# Altium PCB ROW.PcbDoc (part 1 of 3)
Units mm, origin at the board's own origin, x right, y up, seen from the top; angles counter-clockwise.
Board outline 176.65 x 110.9 mm, 2 copper layers (Top Layer, Bottom Layer); 156 components, 298 nets, 1223 pads, 409 vias.
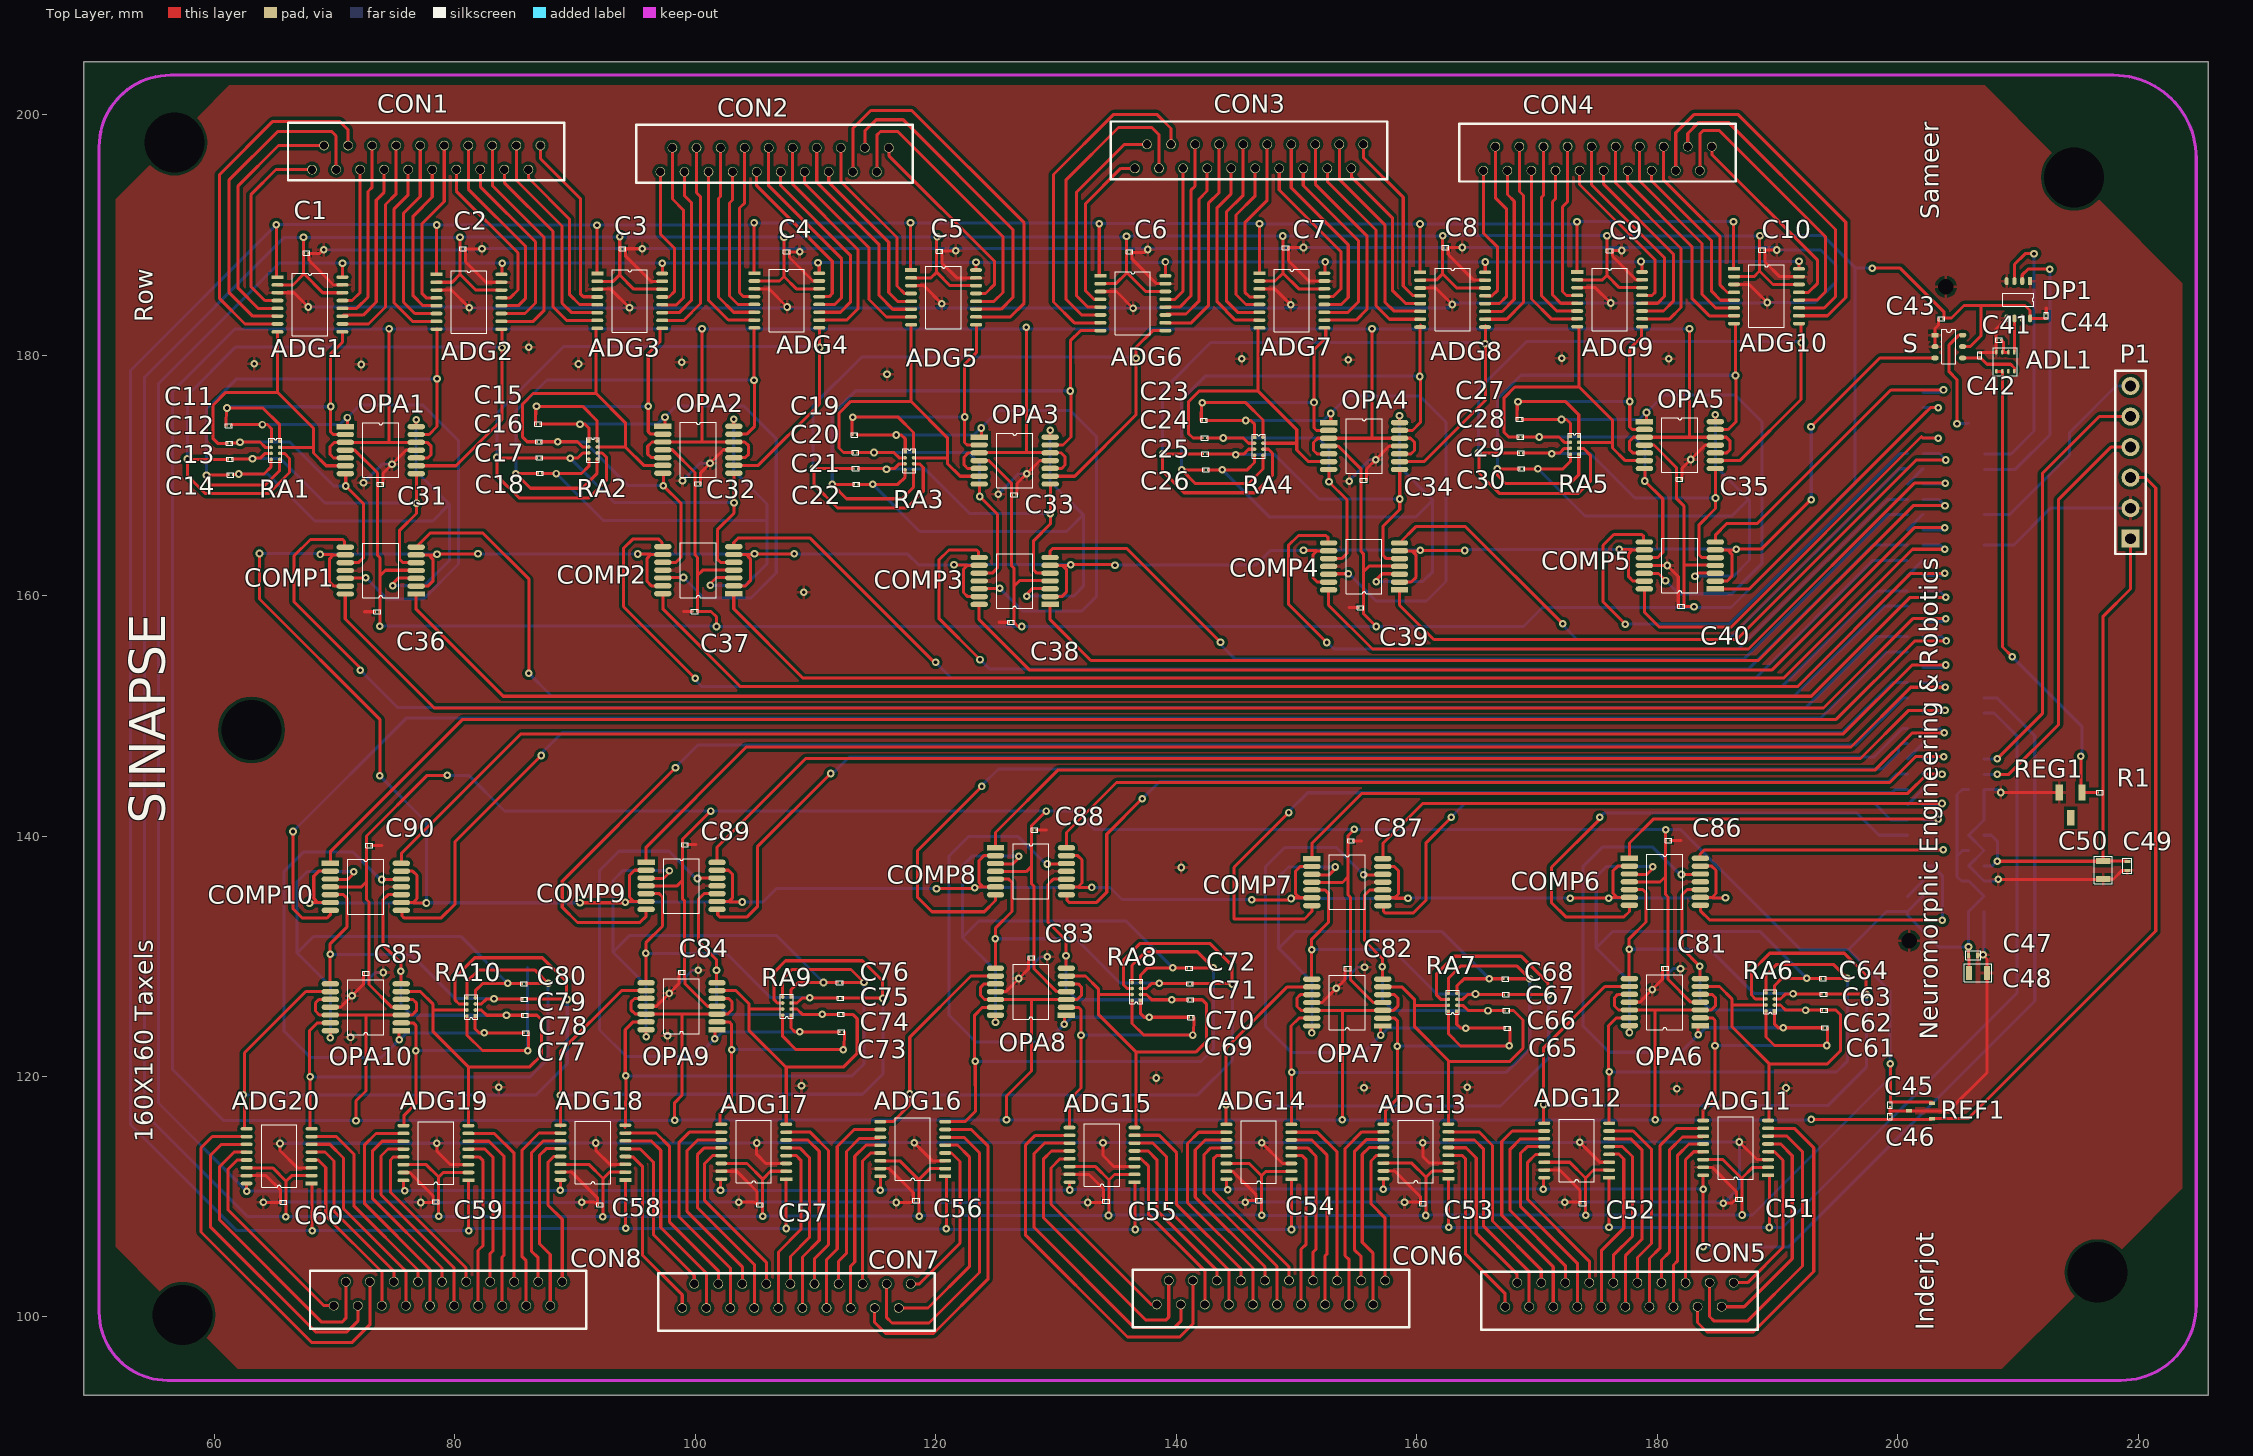
[diagram p0: Top Layer view]
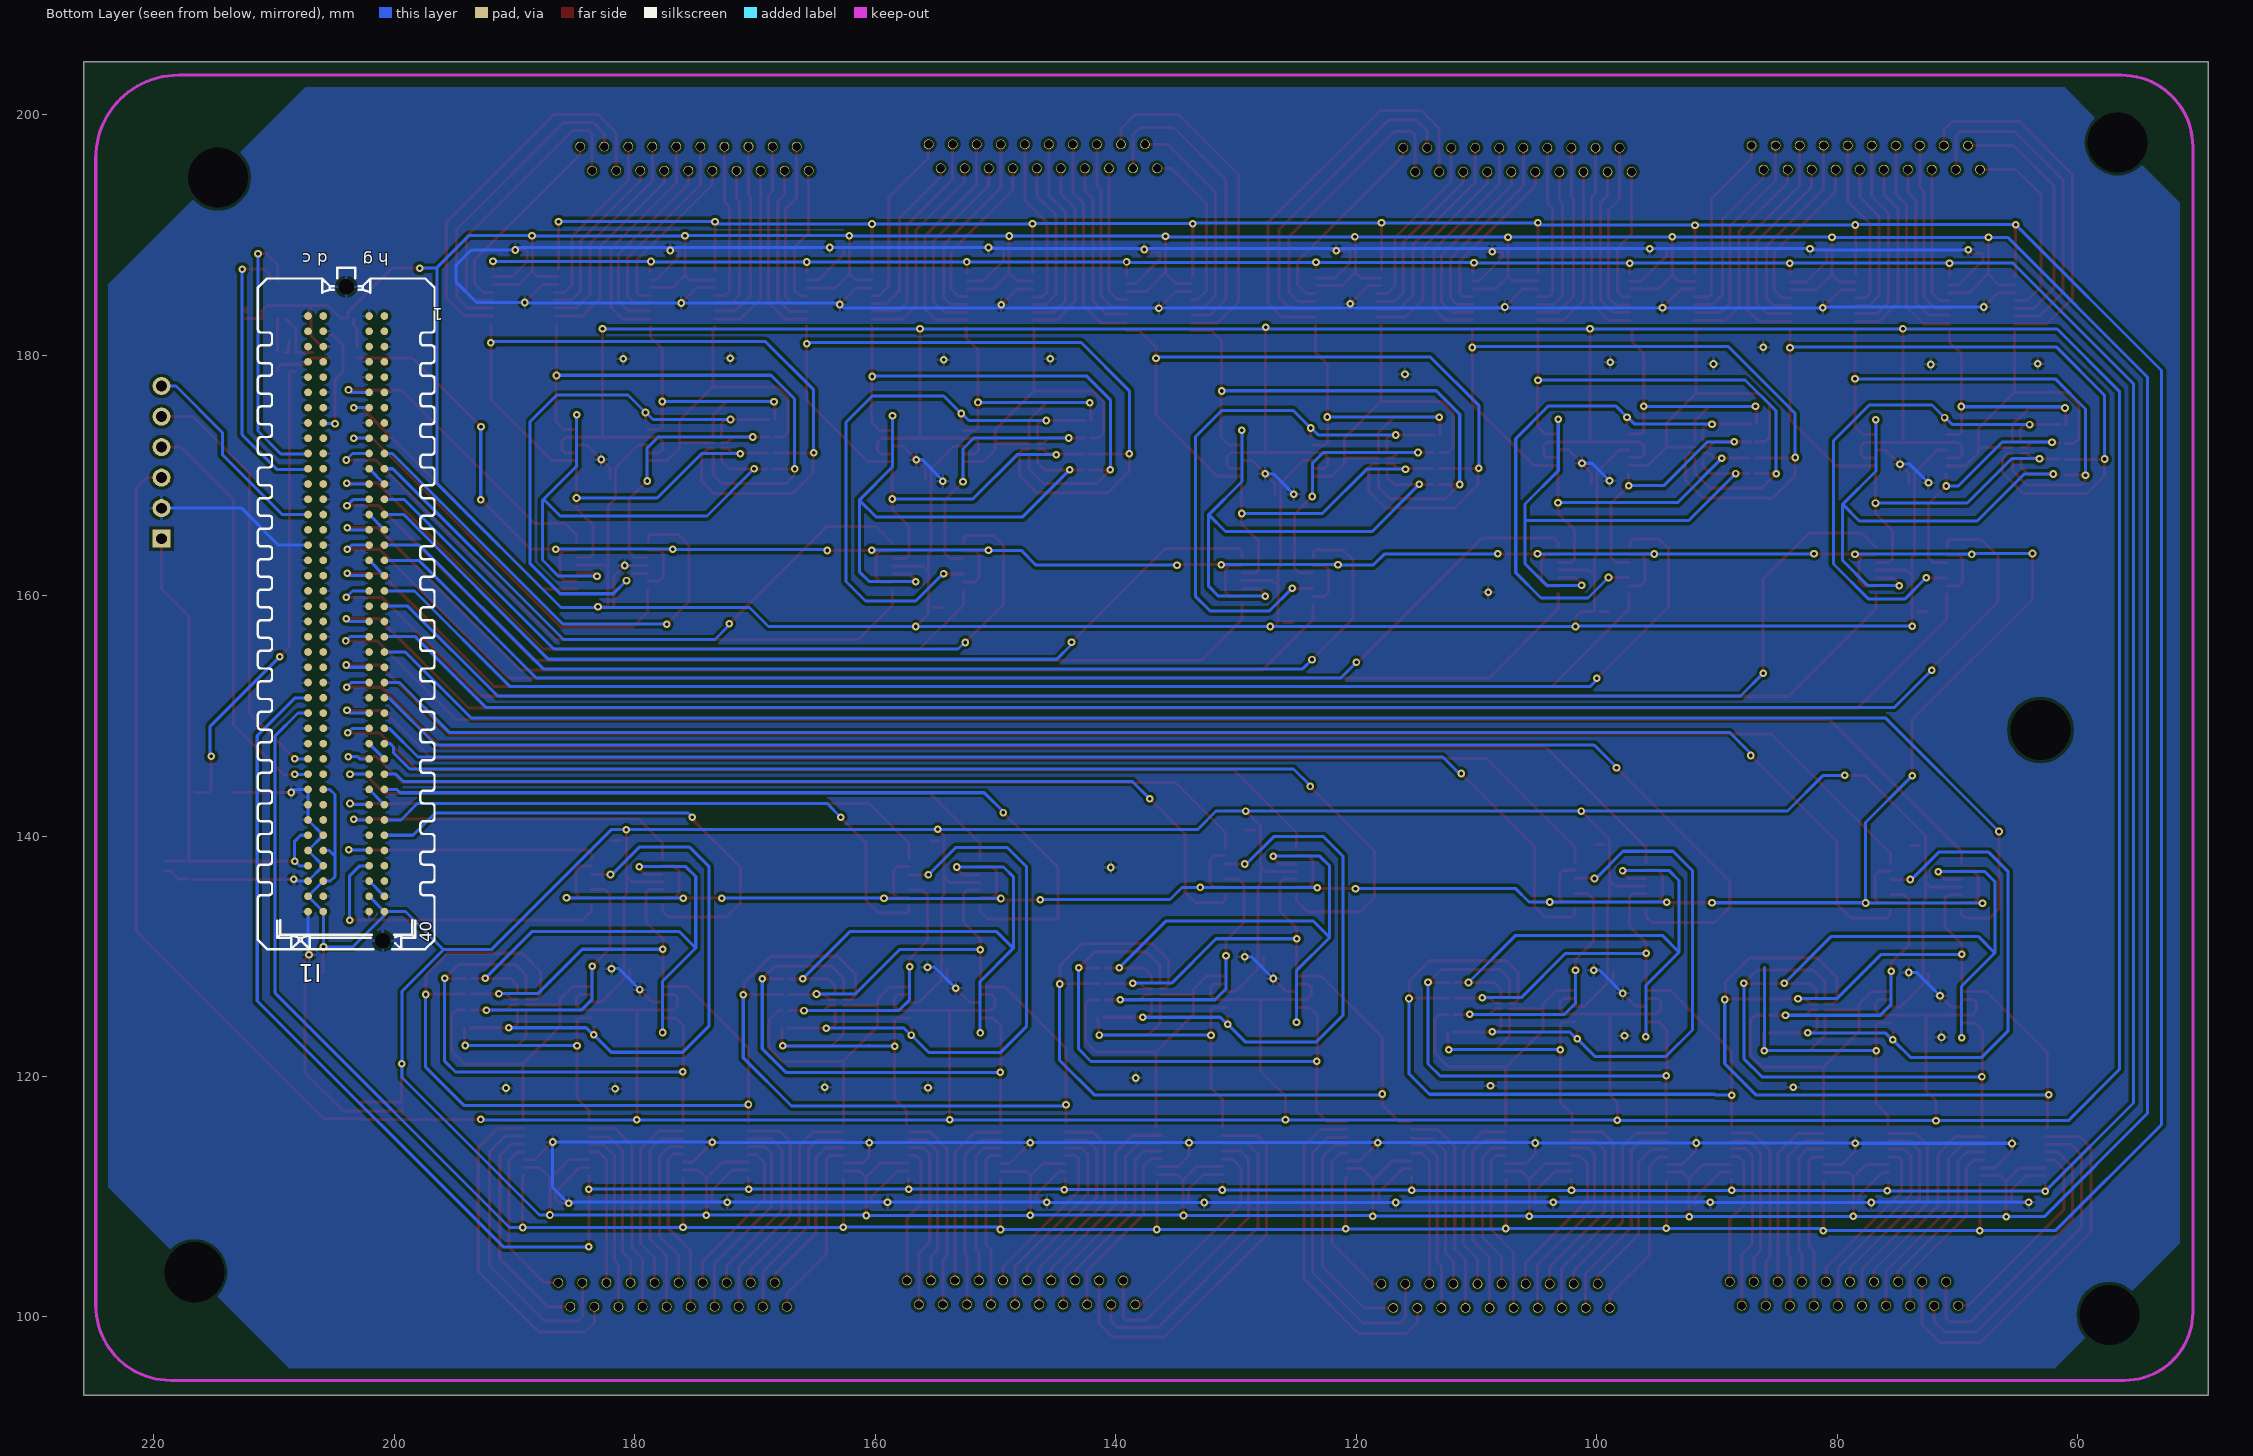
[diagram p1: Bottom Layer view, seen from below]

## Layer stack, top to bottom
Top Solder: solder mask 0.0102, Solder Resist, Dk 3.5
Top Layer: signal copper 0.0356
Dielectric 1: dielectric 0.32, FR-4, Dk 4.8
Bottom Layer: signal copper 0.0356
Bottom Solder: solder mask 0.0102, Solder Resist, Dk 3.5

## Board outline
225.8,93.475 225.8,204.375 49.15,204.375 49.15,93.475

## Design rules (kind name [scope] priority, off if disabled: settings)
Clearance [All] p1: gap=0.254 except(0.1: SMDPad-SMDPad THPad-THPad SMDPad-THPad; 0.2: Arc-Arc Arc-Track Arc-SMDPad Arc-Via THPad-Via Via-Via Track-SMDPad Track-Track SMDPad-Via Track-Via Arc-THPad Track-THPad)
HoleSize [All] p1: absolutevalues=TRUE maxlimit=6 minlimit=0.3 maxpercent=80.000 minpercent=20.000
HoleToHoleClearance [All] p1: gap=0.3 allowstackedmicrovias=TRUE
MinimumSolderMaskSliver [All] p1: minsoldermaskwidth=0
PolygonConnect [All] p1: connectstyle=Relief reliefconductorwidth=0.254 reliefentries=4 polygonreliefangle="90 Angle" airgapwidth=0.254
RoutingVias [All] p1: holewidth=0.305 width=0.635 viastyle="Through Hole" minholewidth=0.305 minwidth=0.635 maxholewidth=0.711 maxwidth=1.27
SilkToSilkClearance [All] p1: silktosilkclearance=0
SilkToSolderMaskClearance [IsPad] p1: minsilkscreentomaskgap=0 clearancetoexposedcopper=TRUE
SolderMaskExpansion [All] p1: expansion=0.05
UnpouredPolygon [All] p1: allowunpoured=FALSE
Width [All] p1: maxlimit=0.8 minlimit=0.2 preferedwidth=0.2
24 further rules are at their usual default settings.

## Components (designator, comment, footprint, x,y, rotation, side; value= is the part's Value field where it differs from the comment)
ADG1 "ADG709" TSSOP16 65.244,186.484 r0 top
ADG2 "ADG709" TSSOP16 78.465,186.706 r0 top
ADG3 "ADG709" TSSOP16 91.84,186.78 r0 top
ADG4 "ADG709" TSSOP16 104.9,186.81 r0 top
ADG5 "ADG709" TSSOP16 117.94,187.07 r0 top
ADG6 "ADG709" TSSOP16 133.684,186.584 r0 top (schematic designator ADG1)
ADG7 "ADG709" TSSOP16 146.905,186.806 r0 top (schematic designator ADG2)
ADG8 "ADG709" TSSOP16 160.28,186.88 r0 top (schematic designator ADG3)
ADG9 "ADG709" TSSOP16 173.34,186.91 r0 top (schematic designator ADG4)
ADG10 "ADG709" TSSOP16 186.38,187.17 r0 top (schematic designator ADG5)
ADG11 "ADG709" TSSOP16 189.216,111.791 r180 top (schematic designator ADG1)
ADG12 "ADG709" TSSOP16 175.995,111.569 r180 top (schematic designator ADG2)
ADG13 "ADG709" TSSOP16 162.62,111.495 r180 top (schematic designator ADG3)
ADG14 "ADG709" TSSOP16 149.56,111.465 r180 top (schematic designator ADG4)
ADG15 "ADG709" TSSOP16 136.52,111.205 r180 top (schematic designator ADG5)
ADG16 "ADG709" TSSOP16 120.776,111.691 r180 top (schematic designator ADG1)
ADG17 "ADG709" TSSOP16 107.555,111.469 r180 top (schematic designator ADG2)
ADG18 "ADG709" TSSOP16 94.18,111.395 r180 top (schematic designator ADG3)
ADG19 "ADG709" TSSOP16 81.12,111.365 r180 top (schematic designator ADG4)
ADG20 "ADG709" TSSOP16 68.08,111.105 r180 top (schematic designator ADG5)
ADL1 "CURRENT MIRROR" LFCSP8 209.7,180.25 r270 top
C1 "Cap" 0402#1 67.65,188.48 r0 top
C2 "Cap" 0402#1 80.66,188.83 r0 top
C3 "Cap" 0402#1 93.94,188.84 r0 top
C4 "Cap" 0402#1 107.6,188.58 r0 top
C5 "Cap" 0402#1 120.29,188.64 r0 top
C6 "Cap" 0402#1 136.09,188.58 r0 top (schematic designator C1)
C7 "Cap" 0402#1 149.1,188.93 r0 top (schematic designator C2)
C8 "Cap" 0402#1 162.38,188.94 r0 top (schematic designator C3)
C9 "Cap" 0402#1 176.04,188.68 r0 top (schematic designator C4)
C10 "Cap" 0402#1 188.73,188.74 r0 top (schematic designator C5)
C11 "Cap" 0402#1 61.195,174.13 r180 top
C12 "Cap" 0402#1 61.255,172.66 r180 top
C13 "Cap" 0402#1 61.295,171.33 r180 top
C14 "Cap" 0402#1 61.345,170.03 r180 top
C15 "Cap" 0402#1 86.93,174.26 r180 top (schematic designator C11)
C16 "Cap" 0402#1 86.99,172.79 r180 top (schematic designator C12)
C17 "Cap" 0402#1 87.03,171.46 r180 top (schematic designator C13)
C18 "Cap" 0402#1 87.08,170.16 r180 top (schematic designator C14)
C19 "Cap" 0402#1 113.24,173.36 r180 top (schematic designator C11)
C20 "Cap" 0402#1 113.3,171.89 r180 top (schematic designator C12)
C21 "Cap" 0402#1 113.34,170.56 r180 top (schematic designator C13)
C22 "Cap" 0402#1 113.39,169.26 r180 top (schematic designator C14)
C23 "Cap" 0402#1 142.3,174.57 r180 top (schematic designator C11)
C24 "Cap" 0402#1 142.36,173.1 r180 top (schematic designator C12)
C25 "Cap" 0402#1 142.4,171.77 r180 top (schematic designator C13)
C26 "Cap" 0402#1 142.45,170.47 r180 top (schematic designator C14)
C27 "Cap" 0402#1 168.56,174.65 r180 top (schematic designator C11)
C28 "Cap" 0402#1 168.62,173.18 r180 top (schematic designator C12)
C29 "Cap" 0402#1 168.66,171.85 r180 top (schematic designator C13)
C30 "Cap" 0402#1 168.71,170.55 r180 top (schematic designator C14)
C31 "Cap" 0402#1 73.8,169.26 r180 top
C32 "Cap" 0402#1 100.21,169.29 r180 top (schematic designator C31)
C33 "Cap" 0402#1 126.52,168.39 r180 top (schematic designator C31)
C34 "Cap" 0402#1 155.58,169.6 r180 top (schematic designator C31)
C35 "Cap" 0402#1 181.84,169.68 r180 top (schematic designator C31)
C36 "Cap" 0402#1 73.54,158.65 r0 top
C37 "Cap" 0402#1 99.95,158.68 r0 top (schematic designator C36)
C38 "Cap" 0402#1 126.26,157.78 r0 top (schematic designator C36)
C39 "Cap" 0402#1 155.32,158.99 r0 top (schematic designator C36)
C40 "Cap" 0402#1 181.986,159.104 r0 top (schematic designator C36)
C41 "Cap" 0402#1 208.4,181.25 r0 top
C42 "Cap" 0402#1 206.815,179.985 r270 top
C43 "Cap" 0402#1 203.625,183.025 r0 top
C44 "Cap" 0402#1 212.345,183.285 r270 top
C45 "Cap" 0402#1 199.35,117.64 r90 top
C46 "Cap" 0402#1 199.35,116.66 r270 top
C47 "Cap" 1005 206.26,130.08 r180 top
C48 "Cap" 2012 206.67,128.61 r180 top
C49 "Cap" 1005 219.095,137.52 r90 top
C50 "Cap" 2012 217.07,137.17 r90 top
C51 "Cap" 0402#2 186.81,109.795 r180 top (schematic designator C1)
C52 "Cap" 0402#1 173.8,109.445 r180 top (schematic designator C2)
C53 "Cap" 0402#1 160.52,109.435 r180 top (schematic designator C3)
C54 "Cap" 0402#1 146.86,109.695 r180 top (schematic designator C4)
C55 "Cap" 0402#1 134.17,109.635 r180 top (schematic designator C5)
C56 "Cap" 0402#1 118.37,109.695 r180 top (schematic designator C1)
C57 "Cap" 0402#1 105.36,109.345 r180 top (schematic designator C2)
C58 "Cap" 0402#1 92.08,109.335 r180 top (schematic designator C3)
C59 "Cap" 0402#1 78.42,109.595 r180 top (schematic designator C4)
C60 "Cap" 0402#1 65.73,109.535 r180 top (schematic designator C5)
C61 "Cap" 0402#1 193.94,124.045 r0 top (schematic designator C11)
C62 "Cap" 0402#1 193.88,125.515 r0 top (schematic designator C12)
C63 "Cap" 0402#1 193.84,126.845 r0 top (schematic designator C13)
C64 "Cap" 0402#1 193.79,128.145 r0 top (schematic designator C14)
C65 "Cap" 0402#1 167.53,124.015 r0 top (schematic designator C11)
C66 "Cap" 0402#1 167.47,125.485 r0 top (schematic designator C12)
C67 "Cap" 0402#1 167.43,126.815 r0 top (schematic designator C13)
C68 "Cap" 0402#1 167.38,128.115 r0 top (schematic designator C14)
C69 "Cap" 0402#1 141.22,124.915 r0 top (schematic designator C11)
C70 "Cap" 0402#1 141.16,126.385 r0 top (schematic designator C12)
C71 "Cap" 0402#1 141.12,127.715 r0 top (schematic designator C13)
C72 "Cap" 0402#1 141.07,129.015 r0 top (schematic designator C14)
C73 "Cap" 0402#1 112.16,123.705 r0 top (schematic designator C11)
C74 "Cap" 0402#1 112.1,125.175 r0 top (schematic designator C12)
C75 "Cap" 0402#1 112.06,126.505 r0 top (schematic designator C13)
C76 "Cap" 0402#1 112.01,127.805 r0 top (schematic designator C14)
C77 "Cap" 0402#1 85.9,123.625 r0 top (schematic designator C11)
C78 "Cap" 0402#1 85.84,125.095 r0 top (schematic designator C12)
C79 "Cap" 0402#1 85.8,126.425 r0 top (schematic designator C13)
C80 "Cap" 0402#1 85.75,127.725 r0 top (schematic designator C14)
C81 "Cap" 0402#1 180.66,129.015 r0 top (schematic designator C31)
C82 "Cap" 0402#1 154.25,128.985 r0 top (schematic designator C31)
C83 "Cap" 0402#1 127.94,129.885 r0 top (schematic designator C31)
C84 "Cap" 0402#1 98.88,128.675 r0 top (schematic designator C31)
C85 "Cap" 0402#1 72.62,128.595 r0 top (schematic designator C31)
C86 "Cap" 0402#1 180.92,139.625 r180 top (schematic designator C36)
C87 "Cap" 0402#1 154.51,139.595 r180 top (schematic designator C36)
C88 "Cap" 0402#1 128.2,140.495 r180 top (schematic designator C36)
C89 "Cap" 0402#1 99.14,139.285 r180 top (schematic designator C36)
C90 "Cap" 0402#1 72.88,139.205 r180 top (schematic designator C36)
COMP1 "MCP6564" TSSOP14 76.78,160.13 r180 top
COMP2 "MCP6564" TSSOP14 103.19,160.16 r180 top (schematic designator COMP1)
COMP3 "MCP6564" TSSOP14 129.5,159.26 r180 top (schematic designator COMP1)
COMP4 "MCP6564" TSSOP14 158.56,160.47 r180 top (schematic designator COMP1)
COMP5 "MCP6564" TSSOP14 184.82,160.55 r180 top (schematic designator COMP1)
COMP6 "MCP6564" TSSOP14 177.68,138.145 r0 top (schematic designator COMP1)
COMP7 "MCP6564" TSSOP14 151.27,138.115 r0 top (schematic designator COMP1)
COMP8 "MCP6564" TSSOP14 124.96,139.015 r0 top (schematic designator COMP1)
COMP9 "MCP6564" TSSOP14 95.9,137.805 r0 top (schematic designator COMP1)
COMP10 "MCP6564" TSSOP14 69.64,137.725 r0 top (schematic designator COMP1)
CON1 "FFC_CON" FFC_THT_20_1 68.115,195.425 r0 top
CON2 "FFC_CON" FFC_THT_20_1 97.092,195.238 r0 top
CON3 "FFC_CON" FFC_THT_20_1 136.555,195.525 r0 top (schematic designator CON1)
CON4 "FFC_CON" FFC_THT_20_1 165.532,195.338 r0 top (schematic designator CON2)
CON5 "FFC_CON" FFC_THT_20_1 186.345,102.85 r180 top (schematic designator CON1)
CON6 "FFC_CON" FFC_THT_20_1 157.368,103.037 r180 top (schematic designator CON2)
CON7 "FFC_CON" FFC_THT_20_1 117.905,102.75 r180 top (schematic designator CON1)
CON8 "FFC_CON" FFC_THT_20_1 88.928,102.937 r180 top (schematic designator CON2)
DP1 "DIGIPOT" DFN8(3x3) 211,186.15 r270 top
I1 "C,D" FMC_LPC_134604 203.99,158.48 r90 bottom
OPA1 "OPA4354" TSSOP14 70.884,174.043 r0 top
OPA2 "OPA4354" TSSOP14 97.294,174.073 r0 top (schematic designator OPA1)
OPA3 "OPA4354" TSSOP14 123.604,173.173 r0 top (schematic designator OPA1)
OPA4 "OPA4354" TSSOP14 152.664,174.383 r0 top (schematic designator OPA1)
OPA5 "OPA4354" TSSOP14 178.924,174.463 r0 top (schematic designator OPA1)
OPA6 "OPA4354" TSSOP14 183.576,124.232 r180 top (schematic designator OPA1)
OPA7 "OPA4354" TSSOP14 157.166,124.202 r180 top (schematic designator OPA1)
OPA8 "OPA4354" TSSOP14 130.856,125.102 r180 top (schematic designator OPA1)
OPA9 "OPA4354" TSSOP14 101.796,123.892 r180 top (schematic designator OPA1)
OPA10 "OPA4354" TSSOP14 75.536,123.812 r180 top (schematic designator OPA1)
P1 "Header 6" HDR1X6 219.35,164.725 r90 top
R1 "Res1" 0402#1 216.83,143.62 r180 top
RA1 "RES_ARR_4" SOP8(RES_ARR) 64.723,172.825 r0 top
RA2 "RES_ARR_4" SOP8(RES_ARR) 91.133,172.855 r0 top (schematic designator RA1)
RA3 "RES_ARR_4" SOP8(RES_ARR) 117.443,171.955 r0 top (schematic designator RA1)
RA4 "RES_ARR_4" SOP8(RES_ARR) 146.503,173.165 r0 top (schematic designator RA1)
RA5 "RES_ARR_4" SOP8(RES_ARR) 172.763,173.245 r0 top (schematic designator RA1)
RA6 "RES_ARR_4" SOP8(RES_ARR) 189.737,125.45 r180 top (schematic designator RA1)
RA7 "RES_ARR_4" SOP8(RES_ARR) 163.327,125.42 r180 top (schematic designator RA1)
RA8 "RES_ARR_4" SOP8(RES_ARR) 137.017,126.32 r180 top (schematic designator RA1)
RA9 "RES_ARR_4" SOP8(RES_ARR) 107.957,125.11 r180 top (schematic designator RA1)
RA10 "RES_ARR_4" SOP8(RES_ARR) 81.697,125.03 r180 top (schematic designator RA1)
REF1 "REF3312" SC70(3) 202.825,117.79 r270 top
REG1 "LM4040" SOT-23(3) 215.33,143.62 r270 top
S "74LVC1G3157" TSOP6 203.095,181.655 r0 top (schematic designator SPDT1)

## Footprints (in the part's own frame and the unit in brackets; to place one, negate y for a bottom-side part, rotate by r counter-clockwise, add the part's x,y. Pads: shape width x height; smd on the part's side, far side on the other; paste and mask are expansions set on the pad)
0402#1 [mm]
  rect 0.1x0.2 smd mask+0.05: 1(-0.15,0) 2(0.15,0)
  silkscreen extent -0.28,-0.18 0.28,0.18
0402#2 [mm] "Chip Capacitor, Body 1.0x0.5mm, IPC High Density"
  rect 0.1x0.2 smd mask+0.05: 1(-0.15,0)
  rect 0.1x0.2 smd: 2(0.15,0)
  silkscreen extent -0.28,-0.18 0.28,0.18
1005 [mm]
  rect 0.25x0.5 smd: 1(-0.375,0) 2(0.375,0)
  silkscreen extent -0.63,-0.38 0.63,0.38
2012 [mm]
  rect 0.5x1.2 smd: 1(-0.75,0) 2(0.75,0)
  silkscreen extent -1.15,-0.75 1.15,0.75
DFN8(3x3) [mm]
  rect 0.65x0.35 smd: 1(0,0)
  oval 0.65x0.35 smd: 2(0,-0.65) 3(0,-1.3) 4(0,-1.95) 5(3.1,-1.95) 6(3.1,-1.3) 7(3.1,-0.65) 8(3.1,0)
  silkscreen extent 1.01,-2.28 2.09,0.33
FFC_THT_20_1 [mm]
  round 0.8 hole 0.7 mask+0.2: 1(0,0) 2(1,2) 3(2,0) 4(3,2) 5(4,0) 6(5,2) 7(6,0) 8(7,2) 9(8,0) 10(9,2) 11(10,0) 12(11,2) 13(12,0) 14(13,2) 15(14,0) 16(15,2) 17(16,0) 18(17,2) 19(18,0) 20(19,2)
  silkscreen extent -2,-0.9 20.98,3.9
FMC_LPC_134604 [mm] "Connector VITA 57, 160 Male contacts in 4 row cdgh"
  round 1 hole 1.3 unplated mask+0.3: 1(-27.191,-3.048) 2(27.191,0)
  round 0.64 smd: c1(24.765,3.175) c2(23.495,3.175) c3(22.225,3.175) c4(20.955,3.175) c5(19.685,3.175) c6(18.415,3.175) c7(17.145,3.175) c8(15.875,3.175) c9(14.605,3.175) c10(13.335,3.175) c11(12.065,3.175) c12(10.795,3.175) c13(9.525,3.175) c14(8.255,3.175) c15(6.985,3.175) c16(5.715,3.175) c17(4.445,3.175) c18(3.175,3.175) c19(1.905,3.175) c20(0.635,3.175) c21(-0.635,3.175) c22(-1.905,3.175) c23(-3.175,3.175) c24(-4.445,3.175) c25(-5.715,3.175) c26(-6.985,3.175) c27(-8.255,3.175) c28(-9.525,3.175) c29(-10.795,3.175) c30(-12.065,3.175) c31(-13.335,3.175) c32(-14.605,3.175) c33(-15.875,3.175) c34(-17.145,3.175) c35(-18.415,3.175) c36(-19.685,3.175) c37(-20.955,3.175) c38(-22.225,3.175) c39(-23.495,3.175) c40(-24.765,3.175) d1(24.765,1.905) d2(23.495,1.905) d3(22.225,1.905) d4(20.955,1.905) d5(19.685,1.905) d6(18.415,1.905) d7(17.145,1.905) d8(15.875,1.905) d9(14.605,1.905) d10(13.335,1.905) d11(12.065,1.905) d12(10.795,1.905) d13(9.525,1.905) d14(8.255,1.905) d15(6.985,1.905) d16(5.715,1.905) d17(4.445,1.905) d18(3.175,1.905) d19(1.905,1.905) d20(0.635,1.905) d21(-0.635,1.905) d22(-1.905,1.905) d23(-3.175,1.905) d24(-4.445,1.905) d25(-5.715,1.905) d26(-6.985,1.905) d27(-8.255,1.905) d28(-9.525,1.905) d29(-10.795,1.905) d30(-12.065,1.905) d31(-13.335,1.905) d32(-14.605,1.905) d33(-15.875,1.905) d34(-17.145,1.905) d35(-18.415,1.905) d36(-19.685,1.905) d37(-20.955,1.905) d38(-22.225,1.905) d39(-23.495,1.905) d40(-24.765,1.905) g1(24.765,-1.905) g2(23.495,-1.905) g3(22.225,-1.905) g4(20.955,-1.905) g5(19.685,-1.905) g6(18.415,-1.905) g7(17.145,-1.905) g8(15.875,-1.905) g9(14.605,-1.905) g10(13.335,-1.905) g11(12.065,-1.905) g12(10.795,-1.905) g13(9.525,-1.905) g14(8.255,-1.905) g15(6.985,-1.905) g16(5.715,-1.905) g17(4.445,-1.905) g18(3.175,-1.905) g19(1.905,-1.905) g20(0.635,-1.905) g21(-0.635,-1.905) g22(-1.905,-1.905) g23(-3.175,-1.905) g24(-4.445,-1.905) g25(-5.715,-1.905) g26(-6.985,-1.905) g27(-8.255,-1.905) g28(-9.525,-1.905) g29(-10.795,-1.905) g30(-12.065,-1.905) g31(-13.335,-1.905) g32(-14.605,-1.905) g33(-15.875,-1.905) g34(-17.145,-1.905) g35(-18.415,-1.905) g36(-19.685,-1.905) g37(-20.955,-1.905) g38(-22.225,-1.905) g39(-23.495,-1.905) g40(-24.765,-1.905) h1(24.765,-3.175) h2(23.495,-3.175) h3(22.225,-3.175) h4(20.955,-3.175) h5(19.685,-3.175) h6(18.415,-3.175) h7(17.145,-3.175) h8(15.875,-3.175) h9(14.605,-3.175) h10(13.335,-3.175) h11(12.065,-3.175) h12(10.795,-3.175) h13(9.525,-3.175) h14(8.255,-3.175) h15(6.985,-3.175) h16(5.715,-3.175) h17(4.445,-3.175) h18(3.175,-3.175) h19(1.905,-3.175) h20(0.635,-3.175) h21(-0.635,-3.175) h22(-1.905,-3.175) h23(-3.175,-3.175) h24(-4.445,-3.175) h25(-5.715,-3.175) h26(-6.985,-3.175) h27(-8.255,-3.175) h28(-9.525,-3.175) h29(-10.795,-3.175) h30(-12.065,-3.175) h31(-13.335,-3.175) h32(-14.605,-3.175) h33(-15.875,-3.175) h34(-17.145,-3.175) h35(-18.415,-3.175) h36(-19.685,-3.175) h37(-20.955,-3.175) h38(-22.225,-3.175) h39(-23.495,-3.175) h40(-24.765,-3.175)
  silkscreen extent -27.89,-7.34 28.78,7.34, body extent -27.89,-7.34 28.78,7.34, height 5.61
HDR1X6 [mm] "Connector; Header; 6 Position"
  rect 1.5x1.5 hole 0.9: 1(0,0)
  round 1.5 hole 0.9: 2(2.54,0) 3(5.08,0) 4(7.62,0) 5(10.16,0) 6(12.7,0)
  silkscreen extent -1.27,-1.27 13.97,1.27
LFCSP8 [mm]
  rect 0.4x0.2 smd: 1(0,0)
  oval 0.4x0.2 smd: 2(0,-0.5) 3(0,-1) 4(0,-1.5) 5(1.6,-1.5) 6(1.6,-1) 7(1.6,-0.5) 8(1.6,0)
  silkscreen extent -0.35,-1.75 1.96,0.25
SC70(3) [mm]
  rect 0.3x0.5 smd mask+0.1: 1(0,0) 2(1.3,0) 3(0.65,-1.9)
SOP8(RES_ARR) [mm]
  rect 0.3x0.3 smd mask+0.04: 1(0,0)
  round 0.3 smd mask+0.04: 2(0,-0.5) 3(0,-1) 4(0,-1.5) 5(0.7,-1.5) 6(0.7,-1) 7(0.7,-0.5) 8(0.7,0)
  silkscreen extent -0.18,-1.75 0.88,0.25
SOT-23(3) [mm]
  rect 1.3x0.6 smd mask+0.1: 1(0,0) 2(0,-1.9) 3(2.1,-0.95)
TSOP6 [mm]
  rect 0.6x0.4 smd: 1(0,0)
  oval 0.6x0.4 smd: 2(0,-0.95) 3(0,-1.9) 4(2.3,-1.9) 5(2.3,-0.95) 6(2.3,0)
  silkscreen extent 0.54,-2.38 1.72,0.48
TSSOP14 [mm]
  rect 1.45x0.45 smd mask+0.05: 1(0,0)
  oval 1.45x0.45 smd mask+0.05: 2(0,-0.65) 3(0,-1.3) 4(0,-1.95) 5(0,-2.6) 6(0,-3.25) 7(0,-3.9) 8(5.9,-3.9) 9(5.9,-3.25) 10(5.9,-2.6) 11(5.9,-1.95) 12(5.9,-1.3) 13(5.9,-0.65) 14(5.9,0)
  silkscreen extent 1.46,-4.23 4.44,0.33
TSSOP16 [mm]
  rect 1x0.3 smd mask+0.075: 1(0,0)
  oval 1x0.3 smd mask+0.075: 2(0,-0.65) 3(0,-1.3) 4(0,-1.95) 5(0,-2.6) 6(0,-3.25) 7(0,-3.9) 8(0,-4.55) 9(5.4,-4.55) 10(5.4,-3.9) 11(5.4,-3.25) 12(5.4,-2.6) 13(5.4,-1.95) 14(5.4,-1.3) 15(5.4,-0.65) 16(5.4,0)
  silkscreen extent 1.23,-4.88 4.17,0.33

## Part data
ADL1: library part ADL5315
C1 C2 C3 C4 C5 C6 C7 C8 C9 C10 C11 C12 C13 C14 C15 C16 C17 C18 C19 C20 C21 C22 C23 C24 C25 C26 C27 C28 C29 C30 C31 C32 C33 C34 C35 C36 C37 C38 C39 C40 C41 C42 C43 C44 C45 C46 C47 C48 C49 C50 C51 C52 C53 C54 C55 C56 C57 C58 C59 C60 C61 C62 C63 C64 C65 C66 C67 C68 C69 C70 C71 C72 C73 C74 C75 C76 C77 C78 C79 C80 C81 C82 C83 C84 C85 C86 C87 C88 C89 C90: "Capacitor"
CON1 CON2 CON3 CON4 CON5 CON6 CON7 CON8: library part FFC_20pin
DP1: library part MCP4542
I1: library part FMC_NEXYS_Video
P1: "Header, 6-Pin"
R1: "Resistor"
RA1 RA2 RA3 RA4 RA5 RA6 RA7 RA8 RA9 RA10: library part RESISTOR_ARRAY_4

## Free pads (board coordinates)
  round 0 hole 5 mask+0: 0(56.67,197.69) 0(57.36,100.17) 0(63.09,148.82) 0(214.66,194.77) 0(216.62,103.72)

## Via types
v1: diameter 0.635, hole 0.305, Top Layer to Bottom Layer, 409 vias

## Nets (pads, with @x,y where several pads share a name; then routed paths per layer and width w, separated by ;. In a path a pad name is that pad's centre, name@x,y a point inside that pad or via, vN(x,y) a via of type N, cw(c..) or ccw(c..) an arc to the next point about the centre after c; other vN are vias at no path point)
5V0: ADL1.5 ADL1.6 R1.2 REG1.1 | length 39.5
  Top Layer w0.254: ADL1.5@208.2,178.65 ADL1.6@208.7,178.65 208.7,155.725 v1(209.525,154.9) ; v1(215.225,146.625) 215.225,143.825 215.43,143.62 216.58,143.62
  Bottom Layer w0.254: v1(209.525,154.9) 215.3,149.125 215.3,146.7 v1(215.225,146.625)
12V0: C49.2 C50.2 I1.c35 I1.c37 P1.1 R1.1 | length 42.8
  Top Layer w0.254: v1(208.275,137.9) 217.08,137.9 217.08,143.62 ; C50.2@217.07,137.92 C50.2@217.105,137.92 ; 217.08,143.595 217.08,158.28 219.35,160.55 P1.1@219.35,164.725 ; C50.2@217.105,137.895 C50.2@217.105,137.92 ; C49.2@219.07,137.92 C50.2@217.105,137.92
  Bottom Layer w0.254: I1.c37@207.165,137.525 207.875,137.525 v1@208.262,137.913 ; I1.c35@207.165,140.065 207.785,140.065 208.275,139.575 v1@208.275,137.925
A1: C11.1 COMP1.12 OPA1.1 RA1.1 | length 44.9
  Top Layer w0.254: 61.434,174.219 v1(63.992,174.219) 64.411,174.219 64.733,173.897 RA1.1@64.733,172.855 ; COMP1.12@70.89,161.42 70.94,161.47 v1@72.68,161.47 ; OPA1.1@71.06,174.219 v1(71.06,174.8)
  Bottom Layer w0.254: v1(63.992,174.219) 70.429,174.219 71.01,174.8 v1(71.06,174.8) 72.11,175.85 77.325,175.85 80.3,172.875 80.3,162.625 77.375,159.7 74.38,159.7 v1@72.645,161.435
  other v1: 72.58,161.47
A2: C12.1 COMP1.10 OPA1.7 RA1.2 | length 23
  Top Layer w0.254: 61.482,172.687 v1@62.105,172.687 ; v1(62.13,172.762) 63.785,172.762 64.222,172.325 RA1.2@64.723,172.325 ; COMP1.10@70.88,162.73 71.97,162.73 72.41,163.17 72.41,167.62 v1(70.92,169.11) OPA1.7@70.92,170.107
  Bottom Layer w0.254: v1(62.13,172.762) 66.263,172.762 69.915,169.11 v1(70.92,169.11)
A3: C13.1 COMP1.5 OPA1.8 RA1.3 | length 27.6
  Top Layer w0.254: 61.545,171.355 v1@63.22,171.355 ; v1@63.288,171.423 63.822,171.423 64.224,171.825 RA1.3@64.723,171.825 ; COMP1.5@76.78,162.73 75.68,162.73 75.41,163 75.41,165.43 76.8,166.82 v1(76.8,167.69) OPA1.8@76.8,170.127
  Bottom Layer w0.254: v1(63.17,171.38) 65.495,171.38 69.185,167.69 v1(76.8,167.69)
A4: C14.1 COMP1.3 OPA1.14 RA1.4 | length 45
  Top Layer w0.254: 61.578,170.063 v1@62.03,170.063 ; v1(62.03,170.113) 64.116,170.113 64.723,170.72 RA1.4@64.723,171.325 ; v1(74.84,160.82) 74.84,160.97 75.34,161.47 COMP1.3@76.74,161.47 ; OPA1.14@76.77,174.057 76.78,174.067 v1(76.78,174.62)
  Bottom Layer w0.254: v1(62.03,170.113) 64.437,170.113 68.35,166.2 78.15,166.2 79.54,167.59 ; v1(74.84,160.82) 77.445,160.82 79.54,162.915 79.54,167.59 ; v1(76.78,174.62) 76.78,170.37 76.77,170.36 79.54,167.59
A5: C15.1 COMP2.12 OPA2.1 RA2.1 | length 45.9
  Top Layer w0.254: 87.16,174.249 v1(90.402,174.249) 90.821,174.249 91.143,173.927 RA2.1@91.143,172.885 ; COMP2.12@97.3,161.45 97.35,161.5 v1(99.015,161.5) ; OPA2.1@97.47,174.249 v1(97.47,174.83)
  Bottom Layer w0.254: v1(90.402,174.249) 96.839,174.249 97.42,174.83 v1(97.47,174.83) 98.415,175.775 104,175.775 106.725,173.05 106.725,161.9 104.625,159.8 100.72,159.8 v1@99.055,161.465
A6: C16.1 COMP2.10 OPA2.7 RA2.2 | length 23.7
  Top Layer w0.254: 87.223,172.792 v1(88.54,172.792) 90.195,172.792 90.632,172.355 RA2.2@91.133,172.355 ; COMP2.10@97.29,162.76 98.38,162.76 98.82,163.2 98.82,167.65 v1(97.33,169.14) OPA2.7@97.33,170.137
  Bottom Layer w0.254: v1(88.54,172.792) 88.552,172.78 90.77,172.78 94.41,169.14 v1(97.33,169.14)
A7: C17.1 COMP2.5 OPA2.8 RA2.3 | length 28.4
  Top Layer w0.254: 87.264,171.453 90.232,171.453 90.634,171.855 RA2.3@91.133,171.855 ; COMP2.5@103.19,162.76 102.09,162.76 101.82,163.03 101.82,165.46 103.21,166.85 v1(103.21,167.72) OPA2.8@103.21,170.157
  Bottom Layer w0.254: v1(89.58,171.41) 93.27,167.72 v1(103.21,167.72)
A8: C18.1 COMP2.3 OPA2.14 RA2.4 | length 45.2
  Top Layer w0.254: 87.312,170.143 v1(88.44,170.143) 90.526,170.143 91.133,170.75 RA2.4@91.133,171.355 ; v1(101.25,160.85) 101.25,161 101.75,161.5 COMP2.3@103.15,161.5 ; OPA2.14@103.18,174.087 103.19,174.097 v1(103.19,174.65)
  Bottom Layer w0.254: v1(88.44,170.143) 92.353,166.23 105.955,166.23 105.95,166.225 ; v1(101.25,160.85) 104.15,160.85 105.95,162.65 105.95,166.225 ; v1(103.19,174.65) 103.19,170.4 103.18,170.39 105.95,167.62 105.95,166.225
A9: C19.1 COMP3.12 OPA3.1 RA3.1 | length 48.4
  Top Layer w0.254: 113.47,173.349 v1(116.712,173.349) 117.131,173.349 117.453,173.027 RA3.1@117.453,171.985 ; COMP3.12@123.61,160.55 123.66,160.6 v1(125.3,160.6) ; OPA3.1@123.78,173.349 v1(123.78,173.93)
  Bottom Layer w0.254: v1(116.712,173.349) 123.149,173.349 123.73,173.93 v1(123.78,173.93) 125.24,175.39 131.17,175.39 133.37,173.19 133.37,159.95 132.145,158.725 127.205,158.725 v1@125.365,160.565
A10: C20.1 COMP3.10 OPA3.7 RA3.2 | length 25.3
  Top Layer w0.254: 113.533,171.892 v1(114.85,171.892) 116.505,171.892 116.942,171.455 RA3.2@117.443,171.455 ; COMP3.10@123.6,161.86 124.69,161.86 125.13,162.3 125.13,166.75 v1(123.64,168.24) OPA3.7@123.64,169.237
  Bottom Layer w0.254: v1(114.85,171.892) 122.704,171.892 122.716,171.88 122.728,171.892 123.64,170.98 v1(123.64,168.24)
A11: C21.1 COMP3.5 OPA3.8 RA3.3 | length 28.4
  Top Layer w0.254: 113.574,170.553 116.542,170.553 116.944,170.955 RA3.3@117.443,170.955 ; COMP3.5@129.5,161.86 128.4,161.86 128.13,162.13 128.13,164.56 129.52,165.95 v1(129.52,166.82) OPA3.8@129.52,169.257
  Bottom Layer w0.254: v1(115.89,170.51) 119.124,170.51 122.814,166.82 v1(129.52,166.82)
A12: C22.1 COMP3.3 OPA3.14 RA3.4 | length 46.4
  Top Layer w0.254: 113.622,169.243 v1(114.75,169.243) 116.836,169.243 117.443,169.85 RA3.4@117.443,170.455 ; v1(127.56,159.95) 127.56,160.1 128.06,160.6 COMP3.3@129.46,160.6 ; OPA3.14@129.49,173.187 129.5,173.197 v1(129.5,173.75)
  Bottom Layer w0.254: v1(114.75,169.243) 118.663,165.33 130.87,165.33 132.26,166.72 ; v1(127.56,159.95) 131.44,159.95 132.26,160.77 132.26,166.72 ; v1(129.5,173.75) 129.5,169.5 129.49,169.49 132.26,166.72
A13: C23.1 COMP4.12 OPA4.1 RA4.1 | length 49
  Top Layer w0.254: 142.53,174.559 v1(145.772,174.559) 146.191,174.559 146.513,174.237 RA4.1@146.513,173.195 ; COMP4.12@152.67,161.76 152.72,161.81 v1(154.31,161.81) ; OPA4.1@152.84,174.559 v1(152.84,175.14)
  Bottom Layer w0.254: v1(145.772,174.559) 152.209,174.559 152.79,175.14 v1(152.84,175.14) 154.3,176.6 160.23,176.6 162.43,174.4 162.43,161.16 160.81,159.54 156.635,159.54 154.55,161.625 154.275,161.625 v1@154.425,161.775
A14: C24.1 COMP4.10 OPA4.7 RA4.2 | length 25.3
  Top Layer w0.254: 142.593,173.102 v1(143.91,173.102) 145.565,173.102 146.002,172.665 RA4.2@146.503,172.665 ; COMP4.10@152.66,163.07 153.75,163.07 154.19,163.51 154.19,167.96 v1(152.7,169.45) OPA4.7@152.7,170.447
  Bottom Layer w0.254: v1(143.91,173.102) 151.764,173.102 151.776,173.09 151.788,173.102 152.7,172.19 v1(152.7,169.45)
A15: C25.1 COMP4.5 OPA4.8 RA4.3 | length 28.4
  Top Layer w0.254: 142.634,171.763 145.602,171.763 146.004,172.165 RA4.3@146.503,172.165 ; COMP4.5@158.56,163.07 157.46,163.07 157.19,163.34 157.19,165.77 158.58,167.16 v1(158.58,168.03) OPA4.8@158.58,170.467
  Bottom Layer w0.254: v1(144.95,171.72) 148.184,171.72 151.874,168.03 v1(158.58,168.03)
A16: C26.1 COMP4.3 OPA4.14 RA4.4 | length 46.4
  Top Layer w0.254: 142.682,170.453 v1(143.81,170.453) 145.896,170.453 146.503,171.06 RA4.4@146.503,171.665 ; v1(156.62,161.16) 156.62,161.31 157.12,161.81 COMP4.3@158.52,161.81 ; OPA4.14@158.55,174.397 158.56,174.407 v1(158.56,174.96)
  Bottom Layer w0.254: v1(143.81,170.453) 147.723,166.54 159.93,166.54 161.32,167.93 ; v1(156.62,161.16) 160.5,161.16 161.32,161.98 161.32,167.93 ; v1(158.56,174.96) 158.56,170.71 158.55,170.7 161.32,167.93
A17: C27.1 COMP5.12 OPA5.1 RA5.1 | length 47.5
  Top Layer w0.254: 168.79,174.639 v1(172.032,174.639) 172.451,174.639 172.773,174.317 RA5.1@172.773,173.275 ; COMP5.12@178.93,161.84 180.09,161.84 v1(180.685,161.245) ; OPA5.1@179.1,174.639 v1(179.1,175.22)
  Bottom Layer w0.254: v1(172.032,174.639) 178.469,174.639 179.05,175.22 v1(179.1,175.22) 180.56,176.68 186.49,176.68 188.69,174.48 188.69,162.64 186.2,160.15 181.78,160.15 v1(180.685,161.245)
A18: C28.1 COMP5.10 OPA5.7 RA5.2 | length 25.3
  Top Layer w0.254: 168.853,173.182 v1(170.17,173.182) 171.825,173.182 172.262,172.745 RA5.2@172.763,172.745 ; COMP5.10@178.92,163.15 180.01,163.15 180.45,163.59 180.45,168.04 v1(178.96,169.53) OPA5.7@178.96,170.527
  Bottom Layer w0.254: v1(170.17,173.182) 178.024,173.182 178.036,173.17 178.048,173.182 178.96,172.27 v1(178.96,169.53)
A19: C29.1 COMP5.5 OPA5.8 RA5.3 | length 28.4
  Top Layer w0.254: 168.894,171.843 171.862,171.843 172.264,172.245 RA5.3@172.763,172.245 ; COMP5.5@184.82,163.15 183.72,163.15 183.45,163.42 183.45,165.85 184.84,167.24 v1(184.84,168.11) OPA5.8@184.84,170.547
  Bottom Layer w0.254: v1(171.21,171.8) 174.444,171.8 178.134,168.11 v1(184.84,168.11)
A20: C30.1 COMP5.3 OPA5.14 RA5.4 | length 45.1
  Top Layer w0.254: 168.942,170.533 v1(170.07,170.533) 172.156,170.533 172.763,171.14 RA5.4@172.763,171.745 ; v1(183.13,161.616) 183.106,161.616 183.38,161.89 COMP5.3@184.78,161.89 ; OPA5.14@184.81,174.477 184.82,174.487 v1(184.82,175.04)
  Bottom Layer w0.254: v1(170.07,170.533) 173.983,166.62 186.19,166.62 187.58,168.01 ; v1(183.13,161.616) 186.332,161.616 187.666,162.95 187.666,167.924 184.81,170.78 184.82,170.79 v1(184.82,175.04)
A21: C61.1 COMP6.12 OPA6.1 RA6.1 | length 49
  Top Layer w0.254: v1(182.005,136.805) 183.52,136.805 COMP6.12@183.57,136.855 ; v1(183.4,123.475) OPA6.1@183.4,124.056 ; RA6.1@189.727,125.42 189.727,124.378 190.049,124.056 v1(190.468,124.056) 193.71,124.056
  Bottom Layer w0.254: v1@181.815,136.84 v1@181.975,137 ; v1@181.95,136.75 179.625,139.075 175.43,139.075 173.81,137.455 173.81,124.215 176.01,122.015 181.94,122.015 v1(183.4,123.475) 183.45,123.475 184.031,124.056 v1(190.468,124.056)
A22: C62.1 COMP6.10 OPA6.7 RA6.2 | length 25.3
  Top Layer w0.254: OPA6.7@183.54,128.168 v1(183.54,129.165) 182.05,130.655 182.05,135.105 182.49,135.545 COMP6.10@183.58,135.545 ; RA6.2@189.737,125.95 190.238,125.95 190.675,125.513 v1(192.33,125.513) 193.647,125.513
  Bottom Layer w0.254: v1(183.54,129.165) 183.54,126.425 184.452,125.513 184.464,125.525 184.476,125.513 v1(192.33,125.513)
A23: C63.1 COMP6.5 OPA6.8 RA6.3 | length 28.4
  Top Layer w0.254: OPA6.8@177.66,128.148 v1(177.66,130.585) 177.66,131.455 179.05,132.845 179.05,135.275 178.78,135.545 COMP6.5@177.68,135.545 ; RA6.3@189.737,126.45 190.236,126.45 190.638,126.852 193.606,126.852
  Bottom Layer w0.254: v1(177.66,130.585) 184.366,130.585 188.056,126.895 v1(191.29,126.895)
A24: C64.1 COMP6.3 OPA6.14 RA6.4 | length 46.4
  Top Layer w0.254: v1(177.68,123.655) 177.68,124.208 OPA6.14@177.69,124.218 ; COMP6.3@177.72,136.805 179.12,136.805 179.62,137.305 v1(179.62,137.455) ; RA6.4@189.737,126.95 189.737,127.555 190.344,128.162 v1(192.43,128.162) 193.558,128.162
  Bottom Layer w0.254: v1(177.68,123.655) 177.68,127.905 177.69,127.915 174.92,130.685 ; v1(179.62,137.455) 175.74,137.455 174.92,136.635 174.92,130.685 ; v1(192.43,128.162) 188.517,132.075 176.31,132.075 174.92,130.685
A25: C65.1 COMP7.12 OPA7.1 RA7.1 | length 48.8
  Top Layer w0.254: v1(155.57,136.775) 157.11,136.775 COMP7.12@157.16,136.825 ; v1(156.99,123.445) OPA7.1@156.99,124.026 ; RA7.1@163.317,125.39 163.317,124.348 163.639,124.026 v1(164.058,124.026) 167.3,124.026
  Bottom Layer w0.254: v1(155.57,136.775) 153.3,139.045 149.02,139.045 147.4,137.425 147.4,124.185 149.6,121.985 155.53,121.985 v1(156.99,123.445) 157.04,123.445 157.621,124.026 v1(164.058,124.026)
A26: C66.1 COMP7.10 OPA7.7 RA7.2 | length 25.3
  Top Layer w0.254: OPA7.7@157.13,128.138 v1(157.13,129.135) 157.13,129.82 155.64,131.31 155.64,135.075 156.08,135.515 COMP7.10@157.17,135.515 ; RA7.2@163.327,125.92 163.828,125.92 164.265,125.483 v1(165.92,125.483) 167.237,125.483
  Bottom Layer w0.254: v1(157.13,129.135) 157.13,126.395 158.042,125.483 158.054,125.495 158.066,125.483 v1(165.92,125.483)
A27: C67.1 COMP7.5 OPA7.8 RA7.3 | length 28.4
  Top Layer w0.254: OPA7.8@151.25,128.118 v1(151.25,130.555) 151.25,131.425 152.64,132.815 152.64,135.245 152.37,135.515 COMP7.5@151.27,135.515 ; RA7.3@163.327,126.42 163.826,126.42 164.228,126.822 167.196,126.822
  Bottom Layer w0.254: v1(151.25,130.555) 157.956,130.555 161.646,126.865 v1(164.88,126.865)
A28: C68.1 COMP7.3 OPA7.14 RA7.4 | length 46.4
  Top Layer w0.254: v1(151.27,123.625) 151.27,124.178 OPA7.14@151.28,124.188 ; COMP7.3@151.31,136.775 152.71,136.775 153.21,137.275 v1(153.21,137.425) ; RA7.4@163.327,126.92 163.327,127.525 163.934,128.132 v1(166.02,128.132) 167.148,128.132
  Bottom Layer w0.254: v1(151.27,123.625) 151.27,127.875 151.28,127.885 148.51,130.655 ; v1(153.21,137.425) 149.33,137.425 148.51,136.605 148.51,130.655 ; v1(166.02,128.132) 162.107,132.045 149.9,132.045 148.51,130.655
A29: C69.1 COMP8.12 OPA8.1 RA8.1 | length 48.7
  Top Layer w0.254: v1(129.26,137.675) 130.8,137.675 COMP8.12@130.85,137.725 ; v1(130.68,124.345) OPA8.1@130.68,124.926 ; RA8.1@137.007,126.29 137.007,125.248 137.329,124.926 v1(137.748,124.926) 140.99,124.926
  Bottom Layer w0.254: v1@129.195,137.61 126.86,139.945 122.71,139.945 121.09,138.325 121.09,125.085 123.29,122.885 129.22,122.885 v1(130.68,124.345) 130.73,124.345 131.311,124.926 v1(137.748,124.926)
A30: C70.1 COMP8.10 OPA8.7 RA8.2 | length 25.3
  Top Layer w0.254: OPA8.7@130.82,129.038 v1(130.82,130.035) 130.82,131.33 129.33,132.82 129.33,135.975 129.77,136.415 COMP8.10@130.86,136.415 ; RA8.2@137.017,126.82 137.518,126.82 137.955,126.383 v1(139.61,126.383) 140.927,126.383
  Bottom Layer w0.254: v1(130.82,130.035) 130.82,127.295 131.732,126.383 131.744,126.395 131.756,126.383 v1(139.61,126.383)
A31: C71.1 COMP8.5 OPA8.8 RA8.3 | length 28.4
  Top Layer w0.254: OPA8.8@124.94,129.018 v1(124.94,131.455) 124.94,132.325 126.33,133.715 126.33,136.145 126.06,136.415 COMP8.5@124.96,136.415 ; RA8.3@137.017,127.32 137.516,127.32 137.918,127.722 140.886,127.722
  Bottom Layer w0.254: v1(124.94,131.455) 131.646,131.455 135.336,127.765 v1(138.57,127.765)
A32: C72.1 COMP8.3 OPA8.14 RA8.4 | length 46.4
  Top Layer w0.254: v1(124.96,124.525) 124.96,125.078 OPA8.14@124.97,125.088 ; COMP8.3@125,137.675 126.4,137.675 126.9,138.175 v1(126.9,138.325) ; RA8.4@137.017,127.82 137.017,128.425 137.624,129.032 v1(139.71,129.032) 140.838,129.032
  Bottom Layer w0.254: v1(124.96,124.525) 124.96,128.775 124.97,128.785 122.2,131.555 ; v1(126.9,138.325) 123.02,138.325 122.2,137.505 122.2,131.555 ; v1(139.71,129.032) 135.797,132.945 123.59,132.945 122.2,131.555
A33: C73.1 COMP9.12 OPA9.1 RA9.1 | length 48.6
  Top Layer w0.254: v1(100.175,136.465) 100.215,136.505 COMP9.12@101.8,136.505 ; v1(101.62,123.135) OPA9.1@101.62,123.716 ; RA9.1@107.947,125.08 107.947,124.038 108.269,123.716 v1(108.688,123.716) 111.93,123.716
  Bottom Layer w0.254: v1@100.035,136.5 97.8,138.735 93.65,138.735 92.03,137.115 92.03,123.875 94.23,121.675 100.16,121.675 v1(101.62,123.135) 101.67,123.135 102.251,123.716 v1(108.688,123.716)
A34: C74.1 COMP9.10 OPA9.7 RA9.2 | length 25.3
  Top Layer w0.254: OPA9.7@101.76,127.828 v1(101.76,128.825) 101.76,129.715 100.27,131.205 100.27,134.765 100.71,135.205 COMP9.10@101.8,135.205 ; RA9.2@107.957,125.61 108.458,125.61 108.895,125.173 v1(110.55,125.173) 111.867,125.173
  Bottom Layer w0.254: v1(101.76,128.825) 101.76,126.085 102.672,125.173 102.684,125.185 102.696,125.173 v1(110.55,125.173)
A35: C75.1 COMP9.5 OPA9.8 RA9.3 | length 28.4
  Top Layer w0.254: OPA9.8@95.88,127.808 v1(95.88,130.245) 95.88,131.115 97.27,132.505 97.27,134.935 97,135.205 COMP9.5@95.9,135.205 ; RA9.3@107.957,126.11 108.456,126.11 108.858,126.512 111.826,126.512
  Bottom Layer w0.254: v1(95.88,130.245) 102.586,130.245 106.276,126.555 v1(109.51,126.555)
A36: C76.1 COMP9.3 OPA9.14 RA9.4 | length 46.4
  Top Layer w0.254: v1(95.9,123.315) 95.9,123.868 OPA9.14@95.91,123.878 ; COMP9.3@95.94,136.465 97.34,136.465 97.84,136.965 v1(97.84,137.115) ; RA9.4@107.957,126.61 107.957,127.215 108.564,127.822 v1(110.65,127.822) 111.778,127.822
  Bottom Layer w0.254: v1(95.9,123.315) 95.9,127.565 95.91,127.575 93.14,130.345 ; v1(97.84,137.115) 93.96,137.115 93.14,136.295 93.14,130.345 ; v1(110.65,127.822) 106.737,131.735 94.53,131.735 93.14,130.345
A37: C77.1 COMP10.12 OPA10.1 RA10.1 | length 48.8
  Top Layer w0.254: v1(73.915,136.385) 75.48,136.385 COMP10.12@75.53,136.435 ; v1(75.36,123.055) OPA10.1@75.36,123.636 ; RA10.1@81.687,125 81.687,123.958 82.009,123.636 v1(82.428,123.636) 85.67,123.636
  Bottom Layer w0.254: v1@73.863,136.332 71.54,138.655 67.39,138.655 65.77,137.035 65.77,123.795 67.97,121.595 73.9,121.595 v1(75.36,123.055) 75.41,123.055 75.991,123.636 v1(82.428,123.636)
A38: C78.1 COMP10.10 OPA10.7 RA10.2 | length 25.3
  Top Layer w0.254: OPA10.7@75.5,127.748 v1(75.5,128.745) 75.5,129.475 74.01,130.965 74.01,134.685 74.45,135.125 COMP10.10@75.54,135.125 ; RA10.2@81.697,125.53 82.198,125.53 82.635,125.093 v1(84.29,125.093) 85.607,125.093
  Bottom Layer w0.254: v1(75.5,128.745) 75.5,126.005 76.412,125.093 76.424,125.105 76.436,125.093 v1(84.29,125.093)
A39: C79.1 COMP10.5 OPA10.8 RA10.3 | length 28.4
  Top Layer w0.254: OPA10.8@69.62,127.728 v1(69.62,130.165) 69.62,131.035 71.01,132.425 71.01,134.855 70.74,135.125 COMP10.5@69.64,135.125 ; RA10.3@81.697,126.03 82.196,126.03 82.598,126.432 85.566,126.432
  Bottom Layer w0.254: v1(69.62,130.165) 76.326,130.165 80.016,126.475 v1(83.25,126.475)
A40: C80.1 COMP10.3 OPA10.14 RA10.4 | length 46.4
  Top Layer w0.254: v1(69.64,123.235) 69.64,123.788 OPA10.14@69.65,123.798 ; COMP10.3@69.68,136.385 71.08,136.385 71.58,136.885 v1(71.58,137.035) ; RA10.4@81.697,126.53 81.697,127.135 82.304,127.742 v1(84.39,127.742) 85.518,127.742
  Bottom Layer w0.254: v1(69.64,123.235) 69.64,127.485 69.65,127.495 66.88,130.265 ; v1(71.58,137.035) 67.7,137.035 66.88,136.215 66.88,130.265 ; v1(84.39,127.742) 80.477,131.655 68.27,131.655 66.88,130.265
DIN: I1.c31 P1.4 | length 34.4
  Top Layer w0.254: v1(208.275,145.125) 209.225,145.125 213.375,149.275 213.375,168 217.72,172.345 P1.4@219.35,172.345
  Bottom Layer w0.254: I1.c31@207.185,145.125 v1(208.275,145.125)